# Altium PCB EVB-A32M1-F_PCB.PcbDoc
Units mm, origin at the board's own origin, x right, y up, seen from the top; angles counter-clockwise.
Board outline 51 x 21 mm, 4 copper layers (L1 (Signal), L2 (GND), L3 (PWR), L4 (Signal)), stack 1.586 mm thick; 29 components, 45 nets, 289 pads, 57 vias.
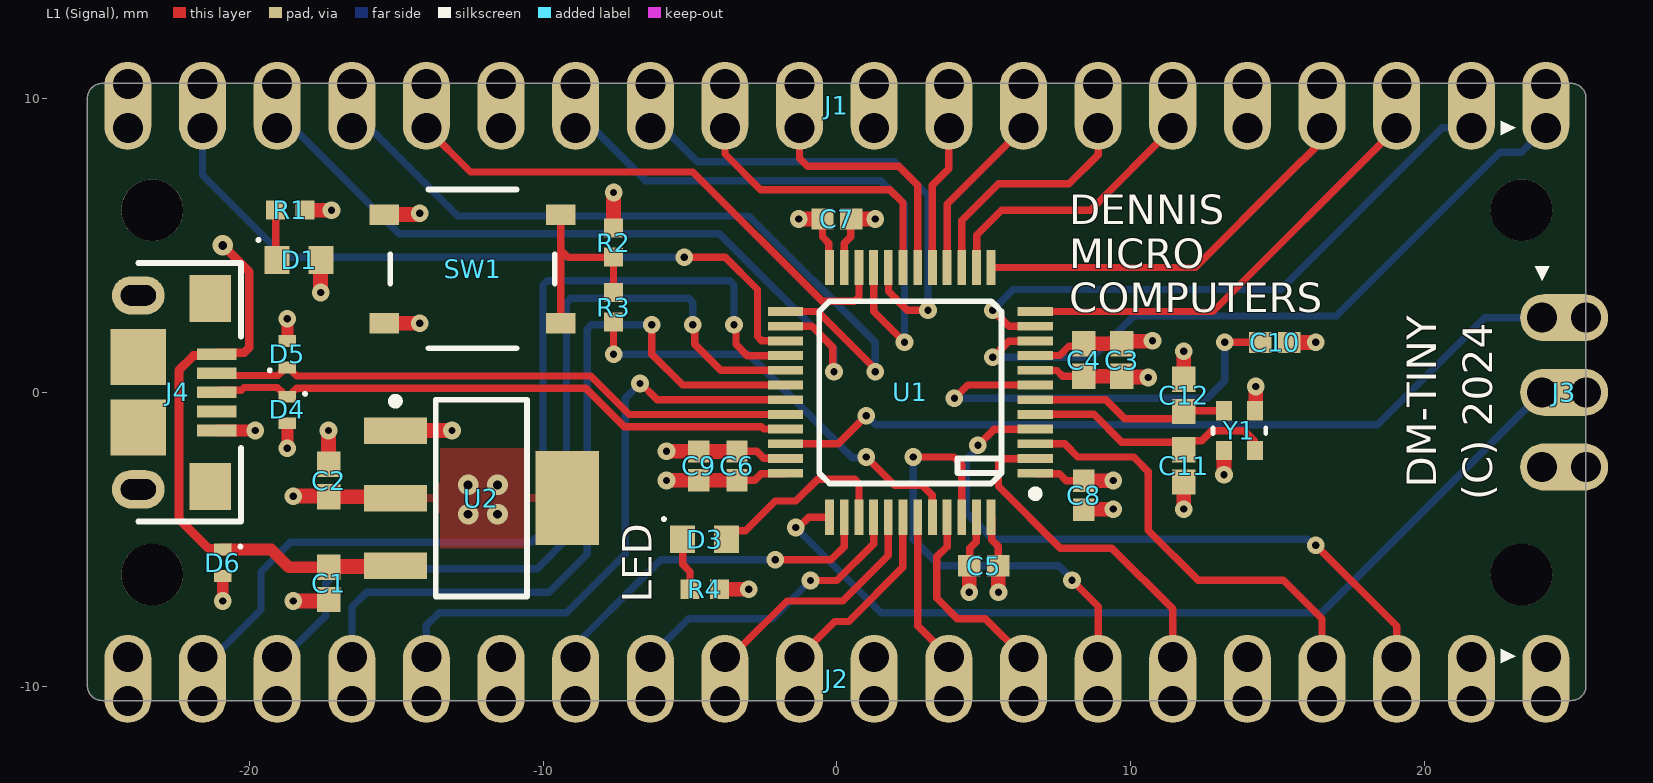
[diagram p0: L1 (Signal) view]
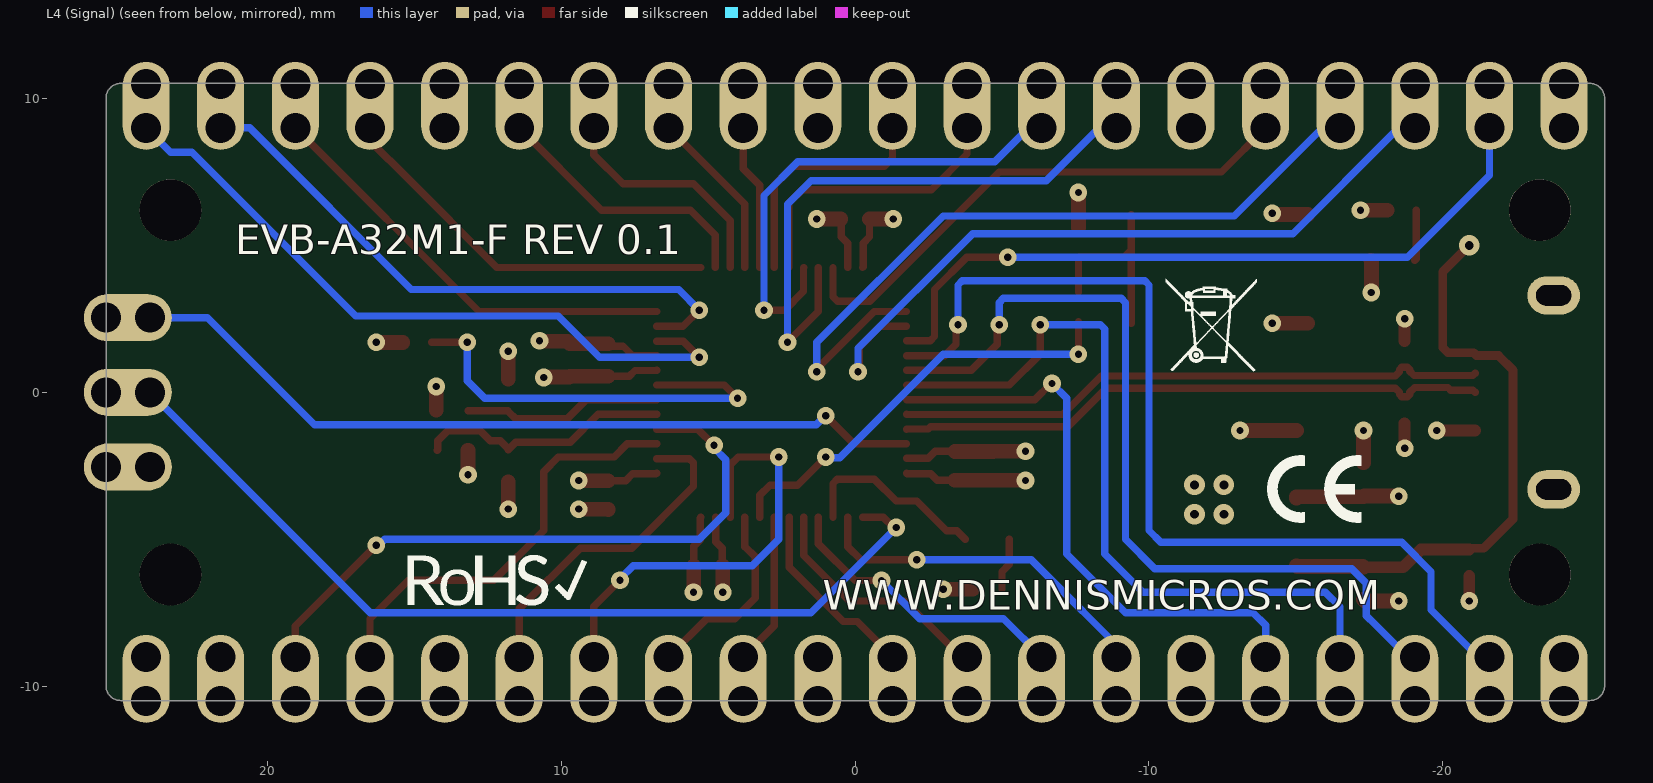
[diagram p1: L4 (Signal) view, seen from below]
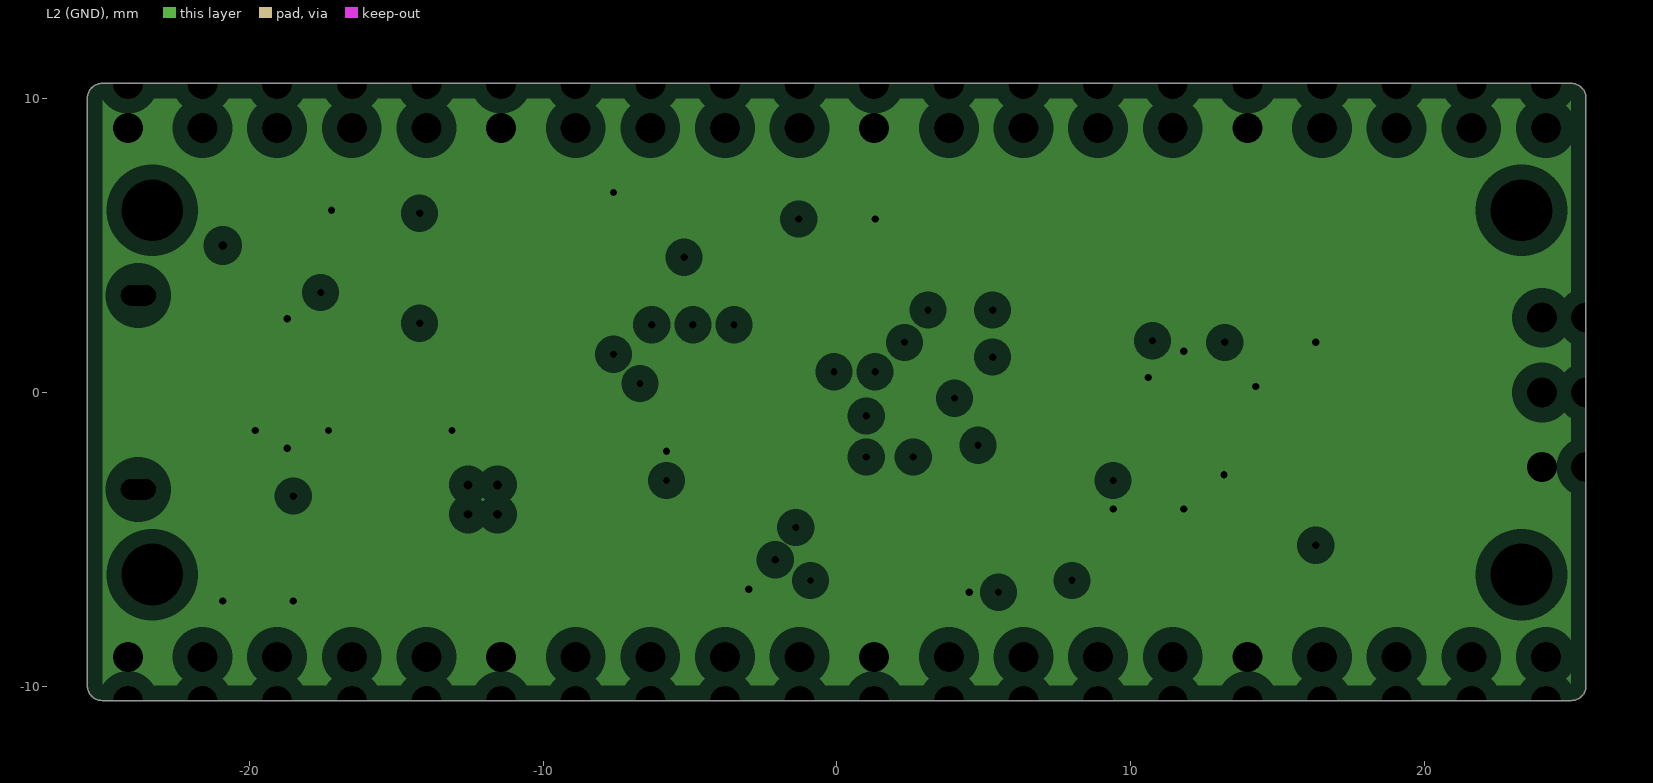
[diagram p2: L2 (GND), clearances drawn from the general rule]
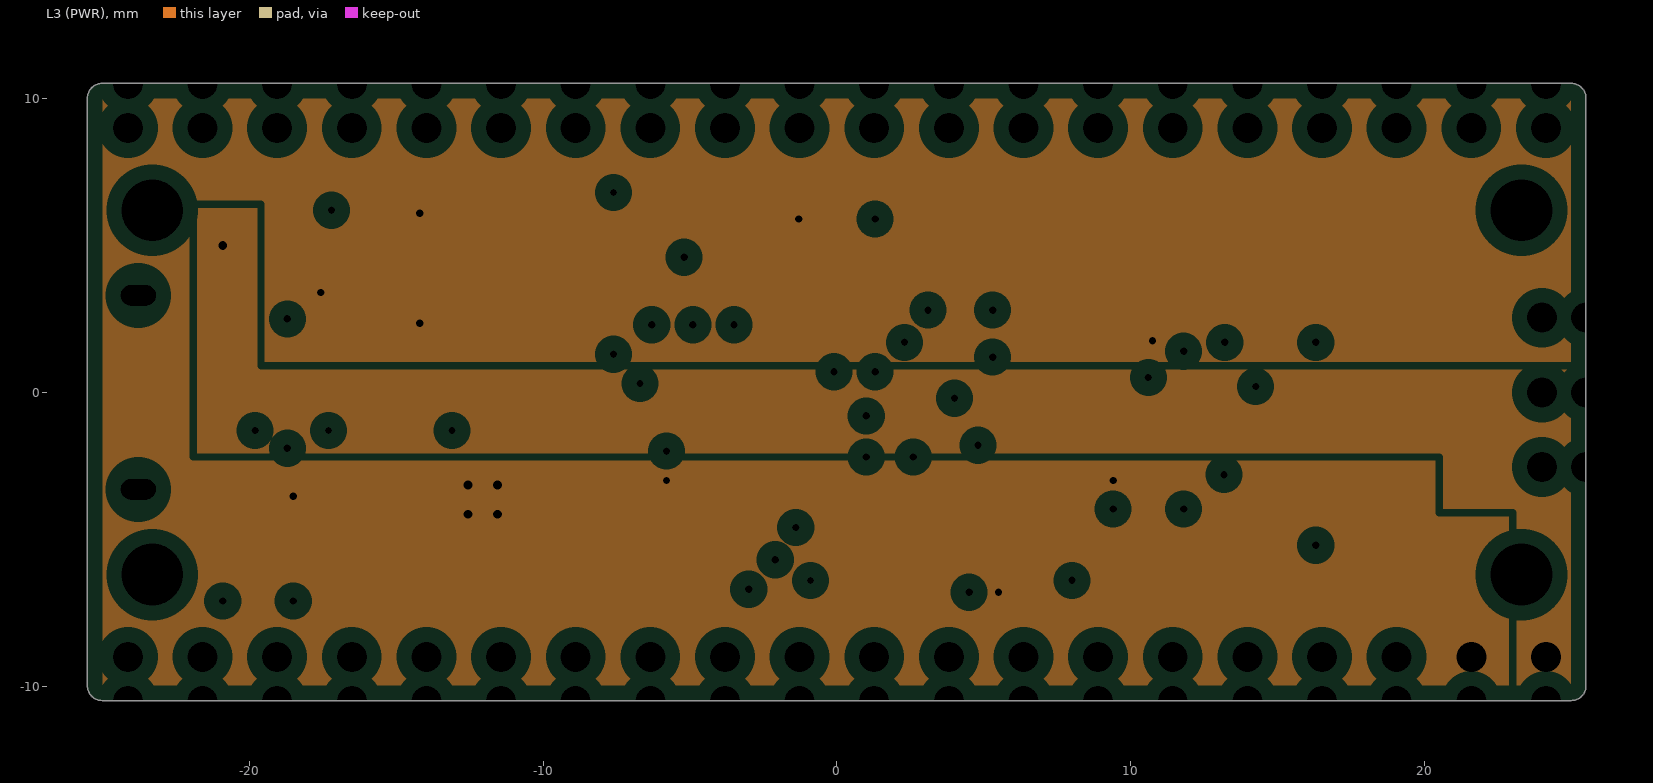
[diagram p3: L3 (PWR), clearances drawn from the general rule]
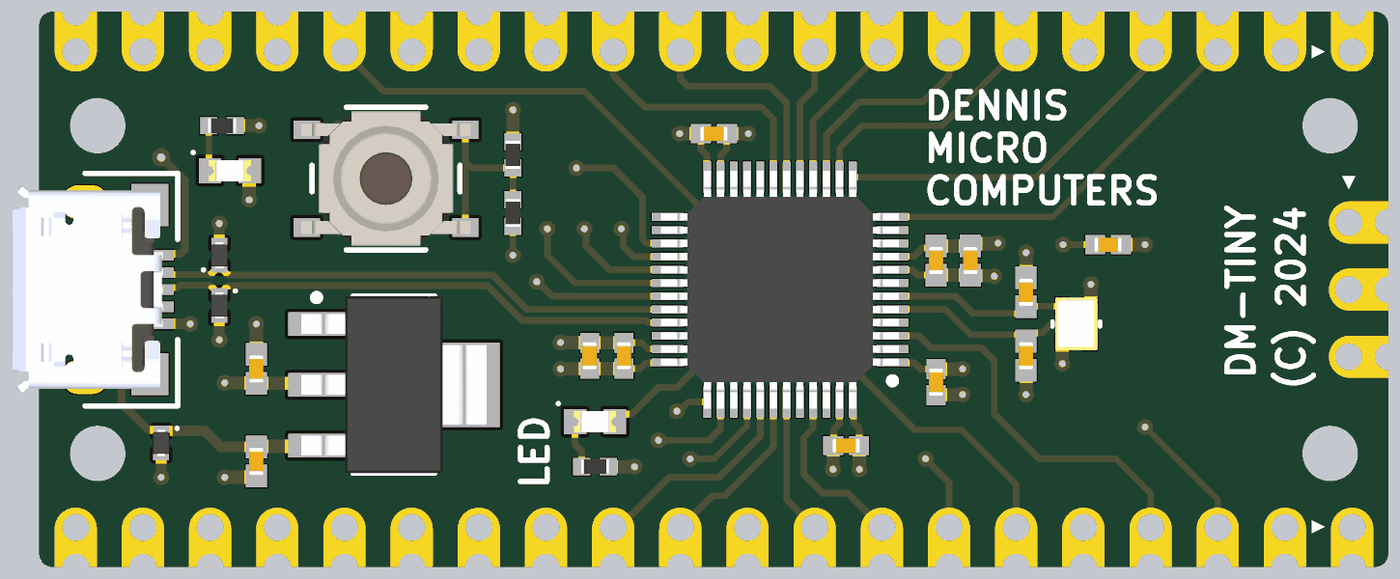
[diagram p4: 3D render of the assembled board from above, using the file's embedded part models]

## Layer stack, top to bottom
Top Solder: solder mask 0.0152, JLC-001, Dk 3.8
L1 (Signal): signal copper 0.035
PP1_7628: prepreg 0.2104, Nan Ya Plastics NP-155F 7628, Dk 4.4
L2 (GND): plane copper 0.0152, net GND
C_FR4: core 1.065, Nan Ya Plastics NP-155F FR4 / 5-7628, Dk 4.6
L3 (PWR): plane copper 0.0152, net +3V3
PP2_7628: prepreg 0.2104, Nan Ya Plastics NP-155F 7628, Dk 4.4
L4 (Signal): signal copper 0.035
Bottom Solder: solder mask 0.0152, JLC-001, Dk 3.8

## Board outline
-25.507,-9.987 -25.507,10.013 cw(c-25.007,10.013) -25.007,10.513 24.993,10.513 cw(c24.993,10.013) 25.493,10.013 25.493,-9.987 cw(c24.993,-9.987) 24.993,-10.487 -25.007,-10.487 cw(c-25.007,-9.987)

## Design rules (kind name [scope] priority, off if disabled: settings)
BoardOutlineClearance [IsText = 'True'] p1: gap=0.3 ignorepadtopadclearanceinfootprint=FALSE
Clearance ClearanceCastellated [InPadClass('Castellated')] p1: gap=0 ignorepadtopadclearanceinfootprint=FALSE
Clearance [All] p2: gap=0.25 ignorepadtopadclearanceinfootprint=FALSE except(0.1: Arc-Arc Arc-Track Track-Track; 0.15: SMDPad-SMDPad; 0.22: Arc-SMDPad Track-SMDPad; 0.27: Arc-Via Arc-Hole Track-Via Track-Hole; 0.5: THPad-THPad)
DiffPairsRouting [InDifferentialPairClass('DIFF_USB')] p1: maxlimit=0.16 minlimit=0.16 mostfreqgap=0.16 toplayer_minwidth=0.25 toplayer_maxwidth=0.25 toplayer_prefwidth=0.25 bottomlayer_minwidth=0.25 bottomlayer_maxwidth=0.25 bottomlayer_prefwidth=0.25 impedanceprofiledriven=TRUE impedanceprofileid={08012B50-AAB2-4C45-ABE7-EA8999D4259F} impedanceprofilevalue=90.000000 maxuncoupledlength=12.7
HoleSize NPTHSlotSize [HoleType = 'Slot' && PadIsPlated = 'False'] p1: absolutevalues=TRUE maxlimit=5.6 minlimit=1 maxpercent=80.000 minpercent=20.000
HoleSize PTHSlotSize [HoleType = 'Slot' && PadIsPlated = 'True'] p2: absolutevalues=TRUE maxlimit=5.6 minlimit=0.5 maxpercent=80.000 minpercent=20.000
HoleSize PTHSize [PadIsPlated = 'True'] p3: absolutevalues=TRUE maxlimit=6.35 minlimit=0.2 maxpercent=80.000 minpercent=20.000
HoleSize NPTHSize [PadIsPlated = 'False'] p4: absolutevalues=TRUE maxlimit=6.3 minlimit=0.2 maxpercent=80.000 minpercent=20.000
HoleToHoleClearance HoleToHoleClearanceCastellated [InPadClass('Castellated')] p1: gap=0.254 allowstackedmicrovias=TRUE
HoleToHoleClearance [All] p2: gap=0.5 allowstackedmicrovias=TRUE
MinimumAnnularRing ViaMinimumAnnularRing [IsVia] p1: minimumring=0.15
MinimumAnnularRing MinimumAnnularRingCastellated [InPadClass('Castellated')] p2: minimumring=0
MinimumAnnularRing PTHSlotMinimumAnnularRing [HoleType = 'Slot' && PadIsPlated = 'True'] p3: minimumring=0.3
MinimumAnnularRing PTHMinimumAnnularRing [HoleType = 'Round' && IsVia = 'False' && PadIsPlated = 'True'] p4: minimumring=0.3
MinimumSolderMaskSliver [All] p1: minsoldermaskwidth=0.1
PlaneClearance [All] p1: clearance=0.508
PlaneConnect [All] p1: pad.planeconnectstyle=Relief pad.reliefexpansion=0.508 pad.reliefentries=4 pad.reliefconductorwidth=0.254 pad.reliefairgap=0.254 via.planeconnectstyle=Direct via.reliefexpansion=0.508 via.reliefentries=4 via.reliefconductorwidth=0.254 via.reliefairgap=0.254
PolygonConnect [All] p1: thpad.connectstyle=Relief thpad.reliefconductorwidth=0.254 thpad.reliefentries=4 thpad.polygonreliefangle="90 Angle" thpad.airgapwidth=0.254 smdpad.connectstyle=Relief smdpad.reliefconductorwidth=0.254 smdpad.reliefentries=4 smdpad.polygonreliefangle="90 Angle" smdpad.airgapwidth=0.254 via.connectstyle=Direct via.reliefconductorwidth=0.254 via.reliefentries=4 via.polygonreliefangle="90 Angle" via.airgapwidth=0.254
RoutingVias [All] p1: holewidth=0.25 width=0.6 viastyle="Through Hole" minholewidth=0.2 minwidth=0.5 maxholewidth=0.3 maxwidth=0.7
ShortCircuit ShortCircuitCastellated [InPadClass('Castellated')] p1: allowed=TRUE
ShortCircuit [All] p2: allowed=FALSE
SilkToSilkClearance [All] p1: silktosilkclearance=0.3
SilkToSolderMaskClearance [IsPad] p1: minsilkscreentomaskgap=0.15 clearancetoexposedcopper=TRUE
SolderMaskExpansion [All] p1: expansion=0.127 istentingtop=FALSE
SupplyNets "Schematic Supply Nets_5" [InNet('VBUS')] p1: voltage=0.000
SupplyNets "Schematic Supply Nets_4" [InNet('GND')] p2: voltage=0.000
SupplyNets "Schematic Supply Nets" [InNet('+3V3')] p3: voltage=0.000
UnRoutedNet [All] p1: checkbadconnections=TRUE
Width [All] p1: maxlimit=0.5 minlimit=0.1 preferedwidth=0.25
20 further rules are at their usual default settings.

## Classes and differential pairs
pad class Castellated: J1-0 J1-1 J1-1B J1-1T J1-2 J1-2B J1-2T J1-3 J1-3B J1-3T J1-4 J1-4B J1-4T J1-5 J1-5B J1-5T J1-6 J1-6B J1-6T J1-7 J1-7B J1-7T J1-8 J1-8B J1-8T J1-9 J1-9B J1-9T J1-10 J1-10B J1-10T J1-11 J1-11B J1-11T J1-12 J1-12B J1-12T J1-13 J1-13B J1-13T J1-14 J1-14B J1-14T J1-15 J1-15B J1-15T J1-16 J1-16B J1-16T J1-17 J1-17B J1-17T J1-18 J1-18B J1-18T J1-19 J1-19B J1-19T J1-20 J1-20B J1-20T J2-0 J2-1 J2-1B J2-1T J2-2 J2-2B J2-2T J2-3 J2-3B J2-3T J2-4 J2-4B J2-4T J2-5 J2-5B J2-5T J2-6 J2-6B J2-6T J2-7 J2-7B J2-7T J2-8 J2-8B J2-8T J2-9 J2-9B J2-9T J2-10 J2-10B J2-10T J2-11 J2-11B J2-11T J2-12 J2-12B J2-12T J2-13 J2-13B J2-13T J2-14 J2-14B J2-14T J2-15 J2-15B J2-15T J2-16 J2-16B J2-16T J2-17 J2-17B J2-17T J2-18 J2-18B J2-18T J2-19 J2-19B J2-19T J2-20 J2-20B J2-20T J3-0 J3-1 J3-1B J3-1T J3-2 J3-2B J3-2T J3-3 J3-3B J3-3T
differential pair class DIFF_USB: USB_D
differential pair USB_D: +USB_D_P -USB_D_N

## Components (designator, comment, footprint, x,y, rotation, side; value= is the part's Value field where it differs from the comment)
C1 "CC0402MRX5R6BB105" C_Yageo_CC_0402_A -17.3,-6.5 r90 top value=1uF
C2 "CC0402MRX5R6BB105" C_Yageo_CC_0402_A -17.3,-3 r270 top value=1uF
C3 "CC0402MRX5R6BB105" C_Yageo_CC_0402_A 9.7,1.1 r90 top value=1uF
C4 "CC0402KRX7R7BB103" C_Yageo_CC_0402_A 8.4,1.1 r90 top value=10nF
C5 "CL05B104KP5NNNC" C_Samsung_CL_0402_A 5,-5.9 r0 top value=100nF
C6 "CL05B104KP5NNNC" C_Samsung_CL_0402_A -3.4,-2.5 r270 top value=100nF
C7 "CL05B104KP5NNNC" C_Samsung_CL_0402_A 0,5.9 r180 top value=100nF
C8 "CL05B104KP5NNNC" C_Samsung_CL_0402_A 8.4,-3.5 r90 top value=100nF
C9 "CL05A475MP5NRNC" C_Samsung_CL_0402_A -4.7,-2.5 r270 top value=4.7uF
C10 "CL05B104KP5NNNC" C_Samsung_CL_0402_A 14.9,1.7 r180 top value=100nF
C11 "CC0402JRNPO9BN150" C_Yageo_CC_0402_A 11.8,-2.5 r90 top value=15pF
C12 "CC0402JRNPO9BN150" C_Yageo_CC_0402_A 11.8,-0.1 r270 top value=15pF
D1 "LTST-C190GKT" D_LED_Lite-On_Green_0603_A -18.3,4.5 r0 top
D3 "LTST-C190GKT" D_LED_Lite-On_Green_0603_A -4.5,-5 r0 top
D4 "D5V0F1U2S9-7" D_TVS_Uni_Diodes_SOD-923_B -18.7,-0.6 r270 top value=5E-13F
D5 "D5V0F1U2S9-7" D_TVS_Uni_Diodes_SOD-923_B -18.7,1.3 r90 top value=5E-13F
D6 "D5V0F1U2S9-7" D_TVS_Uni_Diodes_SOD-923_B -20.9,-5.8 r270 top value=5E-13F
J1 "PPPC201LFBN-RC" J_Cast_TH20_Top_2.54mm 0,9.75 r180 top
J2 "PPPC201LFBN-RC" J_Cast_TH20_Bottom_2.54mm 0,-9.75 r180 top
J3 "PPPC031LFBN-RC" J_Cast_TH3_Bottom_2.54mm 24.75,0 r270 top
J4 "10118193-0001LF" J_USB_Micro-B_Amphenol_10118193-0001LF -23.775,0 r270 top
R1 "RC0402FR-071KL" R_Yageo_RCL_0402_A -18.6,6.2 r180 top value=1kR
R2 "RC0402FR-0710KL" R_Yageo_RCL_0402_A -7.6,5.1 r270 top value=10kR
R3 "RC0402FR-071KL" R_Yageo_RCL_0402_A -7.6,2.9 r90 top value=1kR
R4 "RC0402FR-071KL" R_Yageo_RCL_0402_A -4.5,-6.7 r180 top value=1kR
SW1 "PTS526SK15SMTR2LFS" "SW_Tactitle_SPST_C&K_PTS526 SK15 SMTR2 LFS" -12.4,4.2 r180 top
U1 "STM32F070CBT6" U_ST_LQFP48_B 2.5,0 r180 top
U2 "TLV1117LV33DCYR" U_TI_SOT-223_B -12.1,-3.6 r0 top
Y1 "ECS-240-12-37B-CKY-TR" Y_Crystal_GND24_ECS_240-12-37B-CKY-TR 13.7,-1.3 r90 top

## Footprints (in the part's own frame and the unit in brackets; to place one, negate y for a bottom-side part, rotate by r counter-clockwise, add the part's x,y. Pads: shape width x height; smd on the part's side, far side on the other; paste and mask are expansions set on the pad)
C_Samsung_CL_0402_A [mm] "Chip Capacitor, 2-Leads, Body 1.00x0.50mm, IPC Low Density"
  rect 0.76x0.72 smd mask+0.05: 1(-0.49,0) 2(0.49,0)
  body extent -0.53,-0.28 0.53,0.28, height 0.55
C_Yageo_CC_0402_A [mm] "Yageo series CC Chip Capacitor, 2-Leads, Body 1.00x0.50mm, IPC Low Density"
  rect 0.86x0.8 smd mask+0.05: 1(-0.55,0) 2(0.55,0)
  body extent -0.53,-0.28 0.53,0.28, height 0.7
D_LED_Lite-On_Green_0603_A [mm] "Chip Diode, 2-Leads, Body 1.60x0.70mm, IPC Low Density"
  rect 0.85x0.95 smd: 1(-0.75,0) 2(0.75,0)
  silkscreen extent -1.44,0.64 -1.34,0.74, body extent -0.8,-0.4 0.8,0.4, height 0.8
D_TVS_Uni_Diodes_SOD-923_B [mm] "SODFL, 2-Leads, Body 0.60x1.00mm, IPC Medium Density"
  rect 0.4x0.6 smd: 1(-0.45,0) 2(0.45,0)
  silkscreen extent -0.6,0.55 -0.5,0.65, body extent -0.5,-0.33 0.5,0.33, height 0.4
J_Cast_TH3_Bottom_2.54mm [mm] "20 castellated pads with 2.54mm pitch through-holes"
  round 1.02 hole 1.02 paste-2539.97 mask+0: 0(-2.54,0.75) 0(0,0.75) 0(2.54,0.75) 1(-2.54,-0.75) 2(0,-0.75) 3(2.54,-0.75)
  oval 1.6x3 smd far side paste-2539.97 mask+0: 1B(-2.54,0) 2B(0,0) 3B(2.54,0)
  oval 1.6x3 smd paste-2539.97 mask+0: 1T(-2.54,0) 2T(0,0) 3T(2.54,0)
J_Cast_TH20_Bottom_2.54mm [mm] "20 castellated pads with 2.54mm pitch through-holes"
  round 1.02 hole 1.02 paste-2539.97 mask+0: 0(-24.13,0.75) 0(-21.59,0.75) 0(-19.05,0.75) 0(-16.51,0.75) 0(-13.97,0.75) 0(-11.43,0.75) 0(-8.89,0.75) 0(-6.35,0.75) 0(-3.81,0.75) 0(-1.27,0.75) 0(1.27,0.75) 0(3.81,0.75) 0(6.35,0.75) 0(8.89,0.75) 0(11.43,0.75) 0(13.97,0.75) 0(16.51,0.75) 0(19.05,0.75) 0(21.59,0.75) 0(24.13,0.75) 1(-24.13,-0.75) 2(-21.59,-0.75) 3(-19.05,-0.75) 4(-16.51,-0.75) 5(-13.97,-0.75) 6(-11.43,-0.75) 7(-8.89,-0.75) 8(-6.35,-0.75) 9(-3.81,-0.75) 10(-1.27,-0.75) 11(1.27,-0.75) 12(3.81,-0.75) 13(6.35,-0.75) 14(8.89,-0.75) 15(11.43,-0.75) 16(13.97,-0.75) 17(16.51,-0.75) 18(19.05,-0.75) 19(21.59,-0.75) 20(24.13,-0.75)
  oval 1.6x3 smd far side paste-2539.97 mask+0: 1B(-24.13,0) 2B(-21.59,0) 3B(-19.05,0) 4B(-16.51,0) 5B(-13.97,0) 6B(-11.43,0) 7B(-8.89,0) 8B(-6.35,0) 9B(-3.81,0) 10B(-1.27,0) 11B(1.27,0) 12B(3.81,0) 13B(6.35,0) 14B(8.89,0) 15B(11.43,0) 16B(13.97,0) 17B(16.51,0) 18B(19.05,0) 19B(21.59,0) 20B(24.13,0)
  oval 1.6x3 smd paste-2539.97 mask+0: 1T(-24.13,0) 2T(-21.59,0) 3T(-19.05,0) 4T(-16.51,0) 5T(-13.97,0) 6T(-11.43,0) 7T(-8.89,0) 8T(-6.35,0) 9T(-3.81,0) 10T(-1.27,0) 11T(1.27,0) 12T(3.81,0) 13T(6.35,0) 14T(8.89,0) 15T(11.43,0) 16T(13.97,0) 17T(16.51,0) 18T(19.05,0) 19T(21.59,0) 20T(24.13,0)
J_Cast_TH20_Top_2.54mm [mm] "20 castellated pads with 2.54mm pitch through-holes"
  round 1.02 hole 1.02 paste-2539.97 mask+0: 0(-24.13,-0.75) 0(-21.59,-0.75) 0(-19.05,-0.75) 0(-16.51,-0.75) 0(-13.97,-0.75) 0(-11.43,-0.75) 0(-8.89,-0.75) 0(-6.35,-0.75) 0(-3.81,-0.75) 0(-1.27,-0.75) 0(1.27,-0.75) 0(3.81,-0.75) 0(6.35,-0.75) 0(8.89,-0.75) 0(11.43,-0.75) 0(13.97,-0.75) 0(16.51,-0.75) 0(19.05,-0.75) 0(21.59,-0.75) 0(24.13,-0.75) 1(-24.13,0.75) 2(-21.59,0.75) 3(-19.05,0.75) 4(-16.51,0.75) 5(-13.97,0.75) 6(-11.43,0.75) 7(-8.89,0.75) 8(-6.35,0.75) 9(-3.81,0.75) 10(-1.27,0.75) 11(1.27,0.75) 12(3.81,0.75) 13(6.35,0.75) 14(8.89,0.75) 15(11.43,0.75) 16(13.97,0.75) 17(16.51,0.75) 18(19.05,0.75) 19(21.59,0.75) 20(24.13,0.75)
  oval 1.6x3 smd far side paste-2539.97 mask+0: 1B(-24.13,0) 2B(-21.59,0) 3B(-19.05,0) 4B(-16.51,0) 5B(-13.97,0) 6B(-11.43,0) 7B(-8.89,0) 8B(-6.35,0) 9B(-3.81,0) 10B(-1.27,0) 11B(1.27,0) 12B(3.81,0) 13B(6.35,0) 14B(8.89,0) 15B(11.43,0) 16B(13.97,0) 17B(16.51,0) 18B(19.05,0) 19B(21.59,0) 20B(24.13,0)
  oval 1.6x3 smd paste-2539.97 mask+0: 1T(-24.13,0) 2T(-21.59,0) 3T(-19.05,0) 4T(-16.51,0) 5T(-13.97,0) 6T(-11.43,0) 7T(-8.89,0) 8T(-6.35,0) 9T(-3.81,0) 10T(-1.27,0) 11T(1.27,0) 12T(3.81,0) 13T(6.35,0) 14T(8.89,0) 15T(11.43,0) 16T(13.97,0) 17T(16.51,0) 18T(19.05,0) 19T(21.59,0) 20T(24.13,0)
J_USB_Micro-B_Amphenol_10118193-0001LF [mm] "USB - micro B USB 2.0 Receptacle Connector 5 Position Surface Mount, Right Angle; Through Hole"
  rect 0.4x1.35 smd mask+0.05: 1(-1.3,2.675) 2(-0.65,2.675) 3(0,2.675) 4(0.65,2.675) 5(1.3,2.675)
  rect 1.6x1.4 smd mask+0.05: 6(-3.2,2.45) 7(3.2,2.45)
  rect 1.9x1.9 smd mask+0.05: 8(1.2,0) 9(-1.2,0)
  oval 1.3x1.8 hole 0.7 slot 1.2 at 90 deg mask+0.05: 10(3.3,0) 11(-3.3,0)
  silkscreen extent -4.4,0 4.4,3.5, body extent -3.93,-2.76 3.93,2.95, height 2.81
R_Yageo_RCL_0402_A [mm] "Yageo series RC_L Chip Resistor, 2-Leads, Body 1.00x0.50mm, IPC Low Density"
  rect 0.65x0.65 smd mask+0.05: 1(-0.5,0) 2(0.5,0)
  body extent -0.53,-0.28 0.53,0.28, height 0.4
"SW_Tactitle_SPST_C&K_PTS526 SK15 SMTR2 LFS" [mm]
  rect 1x0.7 smd: 1(-3,1.85) 2(-3,-1.85) 3(3,1.85) 4(3,-1.85)
  silkscreen extent -2.8,-2.7 2.8,2.7, body extent -3.2,-2.55 3.2,2.55, height 1.5
U_ST_LQFP48_B [mm] "LQFP, 48-Leads, Body 9.00x9.00mm, Pitch 0.50mm, IPC Medium Density"
  rect 1.2x0.3 smd mask+0.05: 1(-4.25,2.75) 2(-4.25,2.25) 3(-4.25,1.75) 4(-4.25,1.25) 5(-4.25,0.75) 6(-4.25,0.25) 7(-4.25,-0.25) 8(-4.25,-0.75) 9(-4.25,-1.25) 10(-4.25,-1.75) 11(-4.25,-2.25) 12(-4.25,-2.75) 25(4.25,-2.75) 26(4.25,-2.25) 27(4.25,-1.75) 28(4.25,-1.25) 29(4.25,-0.75) 30(4.25,-0.25) 31(4.25,0.25) 32(4.25,0.75) 33(4.25,1.25) 34(4.25,1.75) 35(4.25,2.25) 36(4.25,2.75)
  rect 0.3x1.2 smd mask+0.05: 13(-2.75,-4.25) 14(-2.25,-4.25) 15(-1.75,-4.25) 16(-1.25,-4.25) 17(-0.75,-4.25) 18(-0.25,-4.25) 19(0.25,-4.25) 20(0.75,-4.25) 21(1.25,-4.25) 22(1.75,-4.25) 23(2.25,-4.25) 24(2.75,-4.25) 37(2.75,4.25) 38(2.25,4.25) 39(1.75,4.25) 40(1.25,4.25) 41(0.75,4.25) 42(0.25,4.25) 43(-0.25,4.25) 44(-0.75,4.25) 45(-1.25,4.25) 46(-1.75,4.25) 47(-2.25,4.25) 48(-2.75,4.25)
  silkscreen extent -4.38,-3.1 3.1,3.57, body extent -4.5,-4.5 4.5,4.5, height 1.55
U_TI_SOT-223_B [mm] "SOT223, 4-Leads, Body 6.50x7.00mm (avg), Pitch 2.30mm, IPC Medium Density"
  rect 2.15x0.9 smd: 1(-2.925,2.3) 2(-2.925,0) 3(-2.925,-2.3)
  rect 2.15x3.2 smd: 4(2.925,0)
  silkscreen extent -3.05,-3.35 1.55,3.42, body extent -3.5,-3.35 3.5,3.35, height 1.8
Y_Crystal_GND24_ECS_240-12-37B-CKY-TR [mm]
  rect 0.65x0.55 smd mask+0.05: 1(-0.675,-0.525) 2(0.675,-0.525) 3(0.675,0.525) 4(-0.675,0.525)
  silkscreen extent -0.1,-0.9 0.1,0.9, body extent -1,-0.8 1,0.8, height 0.51

## Part data
C1 C2 C3: library part CMP-001-00016-11, "Multilayer Ceramic Capacitor, 1 uF, 50 V, ± 10%, X5R, 0402 [1005 Metric]", Case Code (Imperial)=0402, Case Code (Metric)=1005, Dielectric=X5R, LCSC Part Number=C113791, Max Operating Temperature=85°C, Min Operating Temperature=-55°C, Temperature Coefficient=30ppm/°C, Tolerance=20%, Voltage Rating=10V, Case/Package=0402, ComponentLink1Description=Datasheet, ComponentLink1URL=https://www.yageo.com/upload/media/product/app/datasheet/mlcc/upy-gphc_x5r_4v-to-50v.pdf, Dissipation Factor=10%, Halogen Free="Halogen Free", Height=0.5mm, Lead Free="Lead Free", Length=0.039inch, Material=Ceramic, Mounting Technology="Surface Mount", Packaging="Tape and Reel", Pins=2, RoHS Compliant=Yes, Series=CC, Termination=SMD/SMT, Thickness=0.022inch, Voltage Rating (DC)=10V, Width=0.02inch
C4: library part CMP-001-00029-1, "Multilayer Ceramic Capacitor, 0.01 uF, 16 V, ± 10%, X7R, 0402 [1005 Metric]", Case Code (Imperial)=0402, Case Code (Metric)=1005, Dielectric=X7R, Insulation Resistance=10GR, Max Operating Temperature=125°C, Min Operating Temperature=-55°C, Package Quantity=1, Temperature Coefficient=30ppm/°C, Tolerance=10%, Voltage Rating=16V, Case/Package=0402, ComponentLink1Description=Datasheet, ComponentLink1URL=https://www.yageo.com/upload/media/product/productsearch/datasheet/mlcc/UPY-GPHC_X7R_6.3V-to-250V_24.pdf, Depth=0.5mm, Dissipation Factor=3.5%, Halogen Free="Halogen Free", Height=0.5mm, Lead Free="Lead Free", Length=1mm, Material=Ceramic, Mounting Technology="Surface Mount", Packaging="Tape and Reel", Pins=2, Radiation Hardening=No, Reach SVHC Compliant=No, RoHS Compliant=Yes, Series=CC, Termination=SMD/SMT, Thickness=0.022inch, Voltage Rating (AC)=16V, Voltage Rating (DC)=16V, Width=0.02inch
C5 C6 C7 C8 C10: library part CMP-001-00023-3, "Multilayer Ceramic Capacitor, 0.1 uF, 10 V, ± 10%, X7R, 0402 [1005 Metric]", Case Code (Imperial)=0402, Case Code (Metric)=1005, Dielectric=X7R, Max Operating Temperature=125°C, Min Operating Temperature=-55°C, Package Quantity=1, Tolerance=10%, Voltage Rating=10V, Case/Package=0402, Construction=Flat, Depth=0.5mm, Height=0.5mm, Length=1mm, Material=Ceramic, Mounting Technology="Surface Mount", Packaging="Tape and Reel", Radiation Hardening=No, RoHS Compliant=Yes, Series=CL, Thickness=0.022inch, Voltage Rating (DC)=10V, Width=0.02inch
C9: library part CMP-001-00024-3, "Multilayer Ceramic Capacitor, 4.7 uF, 10 V, ± 20%, X5R, 0402 [1005 Metric]", Case Code (Imperial)=0402, Case Code (Metric)=1005, Dielectric=X5R, Max Operating Temperature=85°C, Min Operating Temperature=-55°C, Tolerance=20%, Voltage Rating=10V, Case/Package=0402, ComponentLink1Description=Datasheet, ComponentLink1URL=https://mm.digikey.com/Volume0/opasdata/d220001/medias/docus/863/CL05A475MP5NRNC_Spec.pdf, Height=550um, Lead Free="Lead Free", Material=Ceramic, Mounting Technology="Surface Mount", Packaging="Cut Tape", RoHS Compliant=Yes, Series=CL
C11 C12: library part CMP-001-00017-14, "Multilayer Ceramic Capacitor, 15 pF, 10 V, ± 5%, X7R, 0402 [1005 Metric]", Case Code (Imperial)=0402, Case Code (Metric)=1005, Dielectric=C0G, Dielectric Material=Ceramic, Insulation Resistance=100GR, Max Operating Temperature=125°C, Min Operating Temperature=-55°C, Package Quantity=1, Temperature Coefficient=30ppm/°C, Tolerance=5%, Voltage=50V, Case/Package=0402, ComponentLink1Description=Datasheet, ComponentLink1URL=https://www.yageo.com/upload/media/product/productsearch/datasheet/mlcc/UPY-GP_NP0_16V-to-50V_18.pdf, Depth=0.5mm, Halogen Free="Halogen Free", Height=0.5mm, Lead Free="Lead Free", Length=1mm, Material=Ceramic, Mounting Technology="Surface Mount", Packaging="Tape and Reel", Pins=2, Radiation Hardening=No, Reach SVHC Compliant=No, RoHS Compliant=Yes, Series=CC, Termination=SMD/SMT, Thickness=0.022inch, Voltage Rating=50V, Voltage Rating (AC)=50V, Voltage Rating (DC)=50V, Width=0.02inch
D1 D3: library part CMP-007-00001-3, "LED Uni-Color Green 565nm 2-Pin Chip LED T/R", Case Code (Imperial)=0603, Case Code (Metric)=1608, Color=Green, Forward Current=30mA, Forward Voltage=2.1V, Lens Color=Colorless, Max Operating Temperature=85°C, Min Operating Temperature=-55°C, Package Quantity=1, Power Dissipation=100mW, Reverse Voltage=5V, Test Current=10mA, Voltage=2V, Case/Package=0603, ComponentLink1Description=Datasheet, ComponentLink1URL=https://mm.digikey.com/Volume0/opasdata/d220001/medias/docus/858/LTST-C190GKT.pdf, Depth=0.8mm, Dominant Wavelength=569nm, Height=0.9mm, Illumination Color=Green, Lead Free="Lead Free", Length=1.6mm, Lens Size=0.8mm, Lens Style=Flat,Diffused,Colorless,Rectangular,Clear, Lens Transparency=Clear, Luminous Intensity=6mcd, Mounting Technology="Surface Mount", Number of Elements=1, Number of LEDs=1, Packaging="Tape and Reel", Pins=2, Power Rating=100mW, Radiation Hardening=No, RoHS Compliant=Yes, Series=-, Viewing Angle=130°, Wavelength=565nm, Width=0.8mm
D4 D5 D6: library part CMP-004-00007-2, "Diode TVS Dual Uni-Dir 5.5V 250000W 2-Pin SOD-923 T/R", Breakdown Voltage=6V, Case/Package=SOD-923-2, Clamping Voltage=10V, Max Operating Temperature=150°C, Max Power Dissipation=250mW, Max Reverse Leakage Current=100nA, Max Surge Current=1.5A, Min Operating Temperature=-65°C, Package Quantity=10000, Peak Pulse Power=250kW, Power Line Protection=Yes, Reverse Standoff Voltage=5.5V, ComponentLink1Description=Datasheet, ComponentLink1URL=https://www.diodes.com/assets/Datasheets/D5V0F1U2S9.pdf, Contact Plating=Tin,Matte, Diode Type=ZENER, Direction=Unidirectional, ESD Protection=Yes, Min Breakdown Voltage=6V, Mounting Technology="Surface Mount", Number of Unidirectional Channels=1, Packaging="Tape and Reel", Peak Pulse Current=1.5A, Polarity=Unidirectional, RoHS Compliant=Yes, Series=-, Termination=SMD/SMT, Working Voltage=5.5V
J1 J2: library part CMP-002-00009-9, "20 Position Total Single Row 2.54 mm Pitch Straight Female Header", Flammability Rating="UL94 V-0", Insulation Color=Black, Max Operating Temperature=105°C, Min Operating Temperature=-40°C, Voltage Rating=250V, ComponentLink1Description=Datasheet, ComponentLink1URL=https://mm.digikey.com/Volume0/opasdata/d220001/medias/docus/937/Female_Headers.100_DS.pdf, Connector Type=Header, Contact Finish - Mating=GOLD, Contact Material=Bronze, Contact Shape=Square, Contact Type="Female Socket", Fastening Type=Pull, Height=8.5mm, Housing Material=Plastic, Insulation Material=Polyester, Lead Free="Lead Free", Length=51.3mm, Mounting Technology="Through Hole", Number of Positions=20, Number of Rows=1, Packaging=Tray, Pitch=2.54mm, RoHS Compliant=Yes, Series=-, Termination=Solder, Width=2.5mm
J3: library part CMP-002-00004-17, "3 Position Total Single Row 2.54 mm Pitch Straight Female Header", Flammability Rating="UL94 V-0", Insulation Color=Black, Max Operating Temperature=105°C, Min Operating Temperature=-40°C, Voltage Rating=250V, ComponentLink1Description=Datasheet, ComponentLink1URL=https://mm.digikey.com/Volume0/opasdata/d220001/medias/docus/937/Female_Headers.100_DS.pdf, Connector Type=Header, Contact Finish - Mating=GOLD, Contact Material=Bronze, Contact Shape=Square, Contact Type="Female Socket", Fastening Type=Pull, Height=8.5mm, Housing Material=Plastic, Insulation Material=Polyester, Lead Free="Lead Free", Length=8.12mm, Mounting Technology="Through Hole", Number of Positions=3, Number of Rows=1, Packaging=Tray, Pitch=2.54mm, RoHS Compliant=Yes, Series=-, Termination=Solder, Width=2.5mm
J4: library part CMP-002-00002-12, "Usb Connector, 5 Contact(S), Female, Right Angle, Surface Mount Terminal, Locking, Receptacle", Color=Black, Current Rating=1.8A, Flammability Rating="UL94 V-0", Insulation Resistance=1GR, Max Operating Temperature=85°C, Max Voltage Rating (AC)=100V, Min Operating Temperature=-55°C, Package Quantity=1200, ComponentLink1Description=Drawing, ComponentLink1URL=https://cdn.amphenol-cs.com/media/wysiwyg/files/drawing/10118193.pdf, ComponentLink2Description=Datasheet, ComponentLink2URL=https://cdn.amphenol-cs.com/media/wysiwyg/files/documentation/datasheet/inputoutput/io_usb_micro.pdf, Connector Type=USB,Receptacle, Contact Material=Nickel,Gold, Contact Plating=Gold, Depth=5.67mm, Features=Shielded, Gender=Female, Height=3mm, Housing Material=Polymer, Length=7.86mm, Mounting Technology="Surface Mount,Horizontal", Number of Contacts=5, Number of Ports=1, Orientation="Right Angle", Packaging="Tape and Reel", Pins=11, Pitch=650um, Radiation Hardening=No, Series=-, Termination=Solder, USB Standard="USB 2.0", Voltage Rating=100V
R1 R3 R4: library part CMP-009-00002-11, "SMD Chip Resistor, 1 kOhm, ± 1%, 62.5 mW, 0402 [1005 Metric], Thick Film, General Purpose", Case Code (Imperial)=0402, Case Code (Metric)=1005, Max Operating Temperature=155°C, Max Power Dissipation=63mW, Min Operating Temperature=-55°C, Power Rating=62.5mW, Resistance Tolerance=1%, Resistor Type="Thick Film", Temperature Coefficient=100ppm/°C, Voltage Rating=50V, Case/Package=0402, ComponentLink1Description=Datasheet, ComponentLink1URL=https://www.yageo.com/upload/media/product/products/datasheet/rchip/PYu-RC_Group_51_RoHS_L_12.pdf, Construction=Rectangular, Depth=0.5mm, Features="Moisture Resistant", Height=0.32mm, Lead Free="Lead Free", Length=1mm, Military Standard=Not, Number of Terminations=2, Packaging="Tape and Reel", Pins=2, Reach SVHC Compliant=No, RoHS Compliant=Yes, Series=RC, Technology="THICK FILM", Termination=SMD/SMT, Tolerance=1%, Voltage Rating (AC)=50V, Voltage Rating (DC)=50V, Width=0.5mm
R2: library part CMP-009-00003-11, "SMD Chip Resistor, 10 kOhm, ± 1%, 62.5 mW, 0402 [1005 Metric], Thick Film, General Purpose", Case Code (Imperial)=0402, Case Code (Metric)=1005, Max Operating Temperature=155°C, Max Power Dissipation=63mW, Min Operating Temperature=-55°C, Power Rating=62.5mW, Resistance Tolerance=1%, Resistor Type="Thick Film", Temperature Coefficient=100ppm/°C, Voltage Rating=50V, Case/Package=0402, ComponentLink1Description=Datasheet, ComponentLink1URL=https://www.yageo.com/upload/media/product/products/datasheet/rchip/PYu-RC_Group_51_RoHS_L_12.pdf, Construction=Rectangular, Depth=0.5mm, Features="Moisture Resistant", Lead Free="Lead Free", Lead Pitch=0.2mm, Length=1mm, Military Standard=Not, Number of Terminations=2, Packaging="Tape and Reel", Pins=2, Reach SVHC Compliant=Unknown, RoHS Compliant=Yes, Series=RC, Termination=SMD/SMT, Tolerance=1%, Voltage Rating (DC)=50V, Width=0.5mm
SW1: library part CMP-011-00002-2, "Switch Tactile N.O. SPST Round Button Gull Wing 0.05A 12VDC 200000Cycles 2.45N SMD T/R", Contact Current Rating=50mA, Contact Resistance=100mR, Max Operating Temperature=70°C, Min Operating Temperature=-20°C, Operating Force=260gf, Ratings=IP40, Voltage Rating (DC)=12V, Actuator Type=Standard, ComponentLink1Description=Datasheet, ComponentLink1URL=https://www.ckswitches.com/media/2780/pts526.pdf, Height=1.65mm, Illumination Type=Non-Illuminated, Mechanical Life=200000Cycles, Mounting Technology="Surface Mount", Number of Positions=2, Series=PTS526, Switch Function=Off-Mom, Switch Travel=0.25mm, Termination="Gull Wing", Throw Configuration=SPST
U1: library part CMP-020-00002-1, "IC MCU 32BIT 128KB FLASH 48LQFP", Case/Package=LQFP, Clock Frequency=48MHz, Max Operating Temperature=85°C, Max Power Dissipation=364mW, Max Supply Voltage=3.6V, Min Operating Temperature=-40°C, Min Supply Voltage=2.4V, Operating Supply Voltage=3.3V, Package Quantity=250, Core Architecture=ARM, Data Bus Width=32b, Interface=I2C,SPI,USB,UART,USART, Lead Free="Lead Free", Memory Format=FLASH, Memory Size=128KB, Number of ADC Channels=1, Number of I/Os=37, Number of Programmable I/O=37, Number of Timers/Counters=8, Oscillator Type=Internal, Packaging=Tray, Peripherals=POR,PWM,WDT,DMA, Pins=48, RAM Size=16KB, RoHS Compliant=Yes, Series="STM32 F0", Watchdog Timer=Yes, Weight=0.006409oz
U2: library part CMP-019-00002-2, "LDO Regulator Pos 3.3V 1A 4-Pin(3+Tab) SOT-223 T/R", Case/Package=SOT-223-4, Dropout Voltage=570mV, Max Operating Temperature=125°C, Max Output current=1A, Max Output Voltage=3.3V, Max Supply Voltage=5.5V, Min Input Voltage=2V, Min Operating Temperature=-40°C, Operating Supply Current=50uA, Package Quantity=2500, Power Supply Rejection Ratio (PSRR)=75dB, Accuracy=2%, ComponentLink1Description=Datasheet, ComponentLink1URL=https://www.ti.com/lit/ds/symlink/tlv1117lv.pdf?HQS=dis-dk-null-digikeymode-dsf-pf-null-wwe&ts=1720283554424&ref_url=https%253A%252F%252Fwww.ti.com%252Fgeneral%252Fdocs%252Fsuppproductinfo.tsp%253FdistId%253D10%2526gotoUrl%253Dhttps%253A%252F%252Fwww.ti.com%252Flit%252Fgpn%252Ftlv1117lv, Lead Free="Lead Free", Min Output Voltage=3.3V, Number of Regulators=1, Output Configuration=Positive, Output Current=1A, Output Type=Fixed, Packaging="Cut Tape", Pins=4, Polarity=Positive, Quiescent Current=50uA, RoHS Compliant=Yes, Series=-, Weight=0.009171oz
Y1: library part CMP-003-00000-11, "Crystal 24MHz ±10ppm (Tol) ±10ppm (Stability) 12pF FUND 50Ohm 4-Pin Mini-CSMD T/R", Case/Package="4-SMD, No Lead", Frequency=24MHz, Load Capacitance=12pF, ComponentLink1Description=Datasheet, ComponentLink1URL=https://ecsxtal.com/store/pdf/ECX-1637B.pdf, Size="0.079\" L x 0.063\" W (2.00mm x 1.60mm)"

## Free pads (board coordinates)
  round 2.1 hole 2.1 unplated mask+0: MH1(-23.3,6.2) MH2(-23.3,-6.2) MH3(23.3,-6.2) MH4(23.3,6.2)

## Via types
v1: diameter 0.6, hole 0.25, L1 (Signal) to L4 (Signal), tented both sides, 52 vias
v2: diameter 0.7, hole 0.3, L1 (Signal) to L4 (Signal), tented both sides, 5 vias

## Nets (pads, with @x,y where several pads share a name; then routed paths per layer and width w, separated by ;. In a path a pad name is that pad's centre, name@x,y a point inside that pad or via, vN(x,y) a via of type N, cw(c..) or ccw(c..) an arc to the next point about the centre after c; other vN are vias at no path point)
3V3_LED_K: D1.1 R1.2 | length 1.7
  L1 (Signal) w0.25: R1.2 -19.1,4.55 D1.1
+3V3: C2.2 C3.2 C4.2 C5.2 C6.2 C7.2 C8.2 C9.2 D1.2 J2.2 J2.2B J2.2T SW1.3 SW1.4 U1.1 U1.9 U1.24 U1.36 U1.48 U2.2 U2.4 | length 23.4
  L1 (Signal) w0.25: C6.2 -2.79,-2.99 -2.575,-2.775 -1.775,-2.775 U1.36 ; C7.2 -0.49,5.29 -0.275,5.075 -0.275,4.275 U1.24 ; U1.48 5.275,-4.275 5.275,-5.025 5.49,-5.24 C5.2 ; U1.1 6.775,-2.775 7.575,-2.775 7.81,-3.01 C8.2 ; U1.9 6.755,1.255 7.58,1.255 7.9,1.575 8.325,1.575 C4.2
  L1 (Signal) w0.5: v1@-18.5,-3.5 -18.475,-3.525 -17.325,-3.525 C2.2 -15.025,-3.55 U2.2 ; v1@-17.6,3.4 -17.575,3.425 -17.575,4.475 D1.2 ; SW1.3 v1(-14.2,2.35) ; SW1.4 -14.272,6.05 -14.227,6.095 v1(-14.2,6.095) ; v1(-5.8,-3) -5.795,-2.995 -4.705,-2.995 C9.2 C6.2 ; v1(-1.3,5.9) C7.2 ; C5.2 5.495,-5.905 5.495,-6.795 v1(5.5,-6.8) ; C8.2 8.405,-3.005 9.395,-3.005 v1(9.4,-3) ; C4.2 C3.2 9.787,1.737 10.72,1.737 v1(10.739,1.756)
  other v1: -18.5,-3.53 -17.57,3.4
  other v2: -12.55,-4.15 -11.55,-4.15 -12.55,-3.15 -11.55,-3.15
BOOT0: R3.1 U1.44 | length 14.7
  L1 (Signal) w0.25: v1(-7.6,1.3) R3.1 ; v1(1,-2.2) 1.958,-3.158 2.896,-3.158 3.245,-3.507 3.245,-3.775 U1.44@3.245,-4.245
  L4 (Signal) w0.25: v1(-7.6,1.3) -3,1.3 0.523,-2.223 0.977,-2.223 v1(1,-2.2)
GND: C1.1 C2.1 C3.1 C4.1 C5.1 C6.1 C7.1 C8.1 C9.1 C10.1 C11.1 C12.1 D4.2 D5.2 D6.2 J1.5 J1.5B J1.5T J1.10 J1.10B J1.10T J1.15 J1.15B J1.15T J1.20 J1.20B J1.20T J2.5 J2.5B J2.5T J2.10 J2.10B J2.10T J2.15 J2.15B J2.15T J2.20 J2.20B J2.20T J3.3 J3.3B J3.3T J4.5 R1.1 R2.1 R4.1 U1.8 U1.23 U1.35 U1.47 U2.1 Y1.2 Y1.4 | length 29.9
  L1 (Signal) w0.25: C6.1 -2.728,-2.01 -2.493,-2.245 -1.755,-2.245 U1.35 ; U1.23 0.255,4.255 0.255,5.08 0.475,5.3 0.475,5.885 C7.1 ; C5.1 4.525,-5.885 4.525,-5.3 4.745,-5.08 4.745,-4.255 U1.47 ; U1.8 6.755,0.745 7.493,0.745 7.688,0.55 C4.1
  L1 (Signal) w0.4: J4.5 v1(-19.8,-1.3) ; v1(-20.9,-7.1) D6.2 ; v1(-18.7,-1.9) D4.2 ; D5.2 v1(-18.7,2.5)
  L1 (Signal) w0.5: v1(-18.5,-7.1) -17.35,-7.1 C1.1 ; R1.1 v1(-17.2,6.2) ; C2.1@-17.3,-2.4 v1(-17.3,-1.3) ; U2.1 v1(-13.1,-1.3) ; R2.1 v1(-7.6,6.8) ; v1(-5.8,-2) -5.795,-2.005 -4.705,-2.005 C9.1 C6.1 ; R4.1 v1(-3,-6.7) ; C7.1 v1(1.3,5.9) ; v1(4.5,-6.8) 4.505,-6.795 4.505,-5.905 C5.1 ; C8.1 8.409,-3.981 9.391,-3.981 v1(9.4,-3.972) ; C4.1 C3.1 9.726,0.524 10.581,0.524 v1(10.6,0.505) ; v1(11.8,-3.972) C11.1 ; C12.1 v1(11.8,1.4) ; Y1.4 v1(13.175,-2.8) v1@13.2,-2.8 ; Y1.2@14.25,-0.6 v1(14.25,0.2) ; C10.1 v1(16.3,1.7)
NRST: C10.2 U1.7 | length 14.9
  L1 (Signal) w0.25: v1(4,-0.2) 4.45,0.25 U1.7 ; v1(13.2,1.7) C10.2
  L4 (Signal) w0.25: v1(4,-0.2) 12.6,-0.2 13.2,0.4 v1(13.2,1.7)
OSC_IN: C11.2 U1.5 Y1.1 | length 8.7
  L1 (Signal) w0.25: U1.5 8.75,-0.75 9.7,-1.7 11.55,-1.7 C11.2 11.8,-1.92 12.075,-1.645 12.417,-1.645 12.757,-1.305 13.859,-1.305 14.2,-1.646 14.2,-1.95 Y1.1
OSC_OUT: C12.2 U1.6 Y1.3 | length 6.8
  L1 (Signal) w0.25: U1.6 9.15,-0.25 9.8,-0.9 11.55,-0.9 C12.2 11.825,-0.625 Y1.3
PA0: J1.1 J1.1B J1.1T U1.10 | length 23.7
  L1 (Signal) w0.25: v1(5.3,1.2) 5.845,1.745 6.745,1.745 U1.10
  L4 (Signal) w0.25: v1(5.3,1.2) 8.7,1.2 10.1,2.6 17,2.6 22.57,8.17 23.3,8.17 J1.1
PA1: J1.2 J1.2B J1.2T U1.11 | length 20.5
  L1 (Signal) w0.25: v1(5.3,2.8) 5.855,2.245 6.745,2.245 U1.11
  L4 (Signal) w0.25: v1(5.3,2.8) 6,3.5 15.1,3.5 20.6,9 J1.2
PA2: J1.3 J1.3B J1.3T U1.12 | length 14.9
  L1 (Signal) w0.25: U1.12 12.8,2.75 J1.3
PA3: J1.4 J1.4B J1.4T U1.13 | length 13.5
  L1 (Signal) w0.25: U1.13 12.199,4.25 15.349,7.4 16.363,8.414 16.363,8.853 J1.4
PA4: J1.6 J1.6B J1.6T U1.14 | length 9.3
  L1 (Signal) w0.25: U1.14 4.755,4.255 4.755,5.355 5.6,6.2 8.63,6.2 J1.6
PA5: J1.7 J1.7B J1.7T U1.15 | length 8.1
  L1 (Signal) w0.25: U1.15 4.25,5.85 5.5,7.1 7.9,7.1 8.89,8.09 J1.7
PA6: J1.8 J1.8B J1.8T U1.16 | length 5.8
  L1 (Signal) w0.25: U1.16 3.75,6.4 J1.8
PA7: J1.9 J1.9B J1.9T U1.17 | length 5
  L1 (Signal) w0.25: U1.17 3.25,7.05 3.81,7.61 J1.9
PA8: J2.18 J2.18B J2.18T U1.29 | length 29.5
  L1 (Signal) w0.25: v1(-4.9,2.3) -4.833,2.233 -4.833,1.633 -3.95,0.75 U1.29
  L4 (Signal) w0.25: J2.18 -18.842,-9 -18.591,-8.749 -18.549,-8.749 -17.7,-7.9 -17.4,-7.6 -17.4,-6.5 -16.9,-6 -10.2,-6 -9.2,-5 -9.2,3.054 -9.054,3.2 -5.046,3.2 -4.9,3.054 v1(-4.9,2.3)
PA9: J2.17 J2.17B J2.17T U1.30 | length 26.3
  L1 (Signal) w0.25: v1(-6.3,2.3) -6.3,1.3 -5.25,0.25 U1.30
  L4 (Signal) w0.25: J2.17 -16.5,-8.99 -16.5,-7.3 -16,-6.8 -9.8,-6.8 -8.5,-5.5 -8.5,2.154 -8.354,2.3 v1(-6.3,2.3)
PA10: J2.16 J2.16B J2.16T U1.31 | length 20
  L1 (Signal) w0.25: v1(-6.7,0.3) -6.669,0.3 -6.119,-0.25 U1.31
  L4 (Signal) w0.25: J2.16 -13.97,-7.93 -13.54,-7.5 -9.2,-7.5 -7.2,-5.5 -7.2,-0.2 v1(-6.7,0.3)
PA15: J2.14 J2.14B J2.14T U1.38 | length 11.9
  L1 (Signal) w0.25: v1(-2.1,-5.7) -0.2,-5.7 0.25,-5.25 U1.38
  L4 (Signal) w0.25: J2.14 -8.743,-8.853 -8.743,-8.443 -6.8,-6.5 -6,-5.7 v1(-2.1,-5.7)
PB0: J1.11 J1.11B J1.11T U1.18 | length 8.2
  L1 (Signal) w0.25: J1.11 -1.27,7.97 -1,7.7 2.1,7.7 2.75,7.05 U1.18
PB1: J1.12 J1.12B J1.12T U1.19 | length 9.8
  L1 (Signal) w0.25: J1.12 -3.81,8.11 -2.6,6.9 1.8,6.9 2.25,6.45 U1.19
PB2: J1.13 J1.13B J1.13T U1.20 | length 16.7
  L1 (Signal) w0.25: U1.20 1.755,4.245 1.755,3.445 2.4,2.8 v1(3.1,2.8)
  L4 (Signal) w0.25: J1.13 -6.203,8.853 -5.753,8.853 -4.75,7.85 1.95,7.85 3.1,6.7 v1(3.1,2.8)
PB4: J2.13 J2.13B J2.13T U1.40 | length 10.1
  L1 (Signal) w0.25: v1(-0.9,-6.405) -0.005,-6.405 1.25,-5.15 U1.40
  L4 (Signal) w0.25: J2.13 -5.05,-7.7 -2.195,-7.7 v1(-0.9,-6.405)
PB5: J2.12 J2.12B J2.12T U1.41 | length 8.3
  L1 (Signal) w0.25: J2.12 -3.602,-9 -3.331,-8.729 -3.329,-8.729 -1.7,-7.1 0.2,-7.1 1.75,-5.55 U1.41
PB6: J2.11 J2.11B J2.11T U1.42 | length 6.5
  L1 (Signal) w0.25: J2.11 -0.07,-7.8 0.4,-7.8 2.245,-5.955 2.245,-4.255 U1.42
PB7: J2.9 J2.9B J2.9T U1.43 | length 5.2
  L1 (Signal) w0.25: U1.43 2.75,-7.94 J2.9
PB8: J2.8 J2.8B J2.8T U1.45 | length 6.7
  L1 (Signal) w0.25: U1.45 3.75,-5.25 3.4,-5.6 3.4,-7 4.1,-7.7 5.05,-7.7 J2.8
PB9: J2.7 J2.7B J2.7T U1.46 | length 15.3
  L1 (Signal) w0.25: v1(2.6,-2.2) 3.982,-2.2 4.25,-2.468 U1.46 ; v1(8,-6.4) 8.89,-7.29 J2.7
  L4 (Signal) w0.25: v1(2.6,-2.2) 2.6,-5 3.5,-5.9 7.554,-5.9 8,-6.346 v1(8,-6.4)
PB10: J1.14 J1.14B J1.14T U1.21 | length 20
  L1 (Signal) w0.25: U1.21 1.25,2.75 v1(2.3,1.7)
  L4 (Signal) w0.25: J1.14 -8.809,8.919 -8.219,8.919 -6.5,7.2 1.5,7.2 2.3,6.4 v1(2.3,1.7)
PB11: J1.16 J1.16B J1.16T U1.22 | length 18.2
  L1 (Signal) w0.25: J1.16 -12.47,7.5 -4.9,7.5 -0.5,3.1 0.6,3.1 0.75,3.25 U1.22
PB12: J1.17 J1.17B J1.17T U1.25 | length 25.8
  L1 (Signal) w0.25: U1.25 -0.65,2.75 1.125,0.975 1.125,0.97 1.3,0.795 v1(1.3,0.7)
  L4 (Signal) w0.25: J1.17 -16.439,8.929 -15.829,8.929 -12.9,6 -3,6 1.3,1.7 v1(1.3,0.7)
PB13: J1.18 J1.18B J1.18T U1.26 | length 25.6
  L1 (Signal) w0.25: U1.26 -1.745,2.245 -0.845,2.245 -0.137,1.537 -0.137,0.737 v1(-0.1,0.7)
  L4 (Signal) w0.25: J1.18 -18.949,8.899 -18.399,8.899 -14.9,5.4 -4,5.4 -0.1,1.5 v1(-0.1,0.7)
PB14: J1.19 J1.19B J1.19T U1.27 | length 24.7
  L1 (Signal) w0.25: v1(-5.2,4.6) -3.8,4.6 -2.7,3.5 -2.7,1.9 -2.555,1.755 -1.755,1.755 U1.27
  L4 (Signal) w0.25: J1.19 -21.59,7.39 -18.8,4.6 v1(-5.2,4.6)
PB15: J2.19 J2.19B J2.19T U1.28 | length 33
  L1 (Signal) w0.25: v1(-3.5,2.3) -3.433,2.233 -3.433,1.633 -3.05,1.25 U1.28
  L4 (Signal) w0.25: J2.19 -21.443,-8.853 -21.053,-8.853 -19.6,-7.4 -19.6,-6.1 -18.6,-5.1 -10.4,-5.1 -10,-4.7 -10,3.654 -9.854,3.8 -3.646,3.8 -3.5,3.654 v1(-3.5,2.3)
PC13: J2.6 J2.6B J2.6T U1.2 | length 11.4
  L1 (Signal) w0.25: U1.2 6.745,-2.255 5.646,-2.255 5.5,-2.401 5.5,-3.2 7.6,-5.3 9.36,-5.3 11.43,-7.37 J2.6
PC14: J2.4 J2.4B J2.4T U1.3 | length 14.7
  L1 (Signal) w0.25: U1.3 7.75,-1.75 8.2,-2.2 10.1,-2.2 10.6,-2.7 10.6,-4.7 12.3,-6.4 15.2,-6.4 16.51,-7.71 J2.4
PC15: J2.3 J2.3B J2.3T U1.4 | length 21.9
  L1 (Signal) w0.25: v1(4.8,-1.8) 5.35,-1.25 U1.4 ; v1(16.3,-5.2) 19.05,-7.95 J2.3
  L4 (Signal) w0.25: v1(4.8,-1.8) 4.8,-1.895 4.4,-2.295 4.4,-4.1 5.3,-5 16.005,-5 16.205,-5.2 v1(16.3,-5.2)
PROG_LED: D3.2 U1.39 | length 6.6
  L1 (Signal) w0.25: D3.2 -3.46,-4.71 -3.11,-4.71 -2.1,-3.7 -1.4,-3.7 -0.655,-2.955 0.604,-2.955 0.75,-3.101 U1.39
PROG_LED_K: D3.1 R4.2 | length 1.8
  L1 (Signal) w0.25: D3.1 -5.25,-5.85 -5,-6.1 R4.2
SW_BOOT0: R2.2 R3.2 SW1.1 SW1.2 | length 6.8
  L1 (Signal) w0.25: SW1.1 -9.4,4.846 ; SW1.2 -9.4,4.846 ; R3.2 R2.2 -9.154,4.6 -9.4,4.846
SWCLK: J3.2 J3.2B J3.2T U1.37 | length 31
  L1 (Signal) w0.25: v1(-1.4,-4.6) -1.305,-4.6 -0.955,-4.25 U1.37
  L4 (Signal) w0.25: v1(-1.4,-4.6) 1.5,-7.5 16.5,-7.5 J3.2
SWDIO: J3.1 J3.1B J3.1T U1.34 | length 27.8
  L1 (Signal) w0.25: U1.34 0.05,-1.75 v1(1,-0.8)
  L4 (Signal) w0.25: v1(1,-0.8) 1.021,-0.8 1.321,-1.1 18.4,-1.1 22.04,2.54 J3.1
USB_D_N: D5.1 J4.2 U1.32 | length 20.2
  L1 (Signal) w0.25: J4.2 -21.025,0.575 -20.27,0.575 -19.021,0.575 -18.875,0.721 -18.875,0.775 -18.8,0.85 -18.6,0.85 -18.525,0.775 -18.525,0.701 -18.379,0.555 -8.375,0.555 -7.065,-0.755 -1.755,-0.755 U1.32
USB_D_P: D4.1 J4.3 U1.33 | length 20.3
  L1 (Signal) w0.25: J4.3 -21.025,0.075 -20.27,0.075 -20.18,0.165 -19.041,0.165 -18.875,-0.001 -18.875,-0.075 -18.8,-0.15 -18.6,-0.15 -18.525,-0.075 -18.525,-0.001 -18.379,0.145 -8.545,0.145 -7.235,-1.165 -2.573,-1.165 -2.493,-1.245 -1.755,-1.245 U1.33
VBUS: C1.2 D6.1 J2.1 J2.1B J2.1T J4.1 U2.3 | length 19.8
  L1 (Signal) w0.3: J4.1 J4.1@-21.05,1.35 ; D6.1 -20.943,-5.307 -21.393,-5.307 -22.395,-4.305 -22.395,0.753 -21.898,1.25 -21.15,1.25 J4.1@-21.05,1.35 ; v2(-20.9,5) -20,4.1 -20,1.526 -20.176,1.35 J4.1@-21.05,1.35
  L1 (Signal) w0.4: D6.1 -19.25,-5.35 -18.65,-5.95 C1.2
  L1 (Signal) w0.5: C1.2 -17.275,-5.925 -15.05,-5.925 U2.3
pads on no net: J1.0 J2.0 J3.0 J4.4 J4.6 J4.7 J4.8 J4.9 J4.10 J4.11

## Polygon pours and split planes (outlines as drawn)
+3V3 on L1 (Signal) "+3V3_L01_P000" (solid, pour order 0): -16.2,-3.1 -13.5,-3.1 -13.5,-1.9 -8,-1.9 -8,-5.3 -13.5,-5.3 -13.5,-4.1 -16.2,-4.1
GND on L2 (GND) (split plane): 24.983,-9.977 -24.997,-9.977 -24.997,10.003 24.983,10.003
+3V3 on L3 (PWR) (split plane): 24.983,1.027 -19.473,1.027 -19.473,6.4 -19.482,6.449 -19.51,6.49 -19.551,6.518 -19.6,6.527 -21.9,6.527 -21.949,6.518 -21.99,6.49 -22.018,6.449 -22.027,6.4 -22.027,2.9 -22.027,-2.2 -22.018,-2.249 -21.99,-2.29 -21.949,-2.318 -21.9,-2.327 20.373,-2.327 20.373,-4.1 20.382,-4.149 20.41,-4.19 20.451,-4.218 20.5,-4.227 22.873,-4.227 22.873,-9.977 -24.997,-9.977 -24.997,10.003 24.983,10.003
VBUS on L3 (PWR) (split plane): -19.727,0.9 -19.718,0.851 -19.69,0.81 -19.649,0.782 -19.6,0.773 24.983,0.773 24.983,-9.977 23.127,-9.977 23.127,-4.1 23.118,-4.051 23.09,-4.01 23.049,-3.982 23,-3.973 20.627,-3.973 20.627,-2.2 20.618,-2.151 20.59,-2.11 20.549,-2.082 20.5,-2.073 -21.773,-2.073 -21.773,2.9 -21.773,6.273 -19.727,6.273

## Other copper
L3 (PWR) (plane layer: these items are gaps in the copper):
  lines w0.1: 22.9,-10.6 25.6,-10.6 25.6,0.9
  lines w0.25: 22.9,-10.6 23,-10.6 23,-4.1 20.5,-4.1 20.5,-2.2 -21.9,-2.2 -21.9,2.9 -21.9,6.4 -19.6,6.4 -19.6,0.9 25.6,0.9

## Silkscreen, mask and mechanical layers (free items; w line width, h text height)
Top Overlay:
  region: 22.6,-8.725 22.6,-9.225 23.1,-8.975
  region: 22.6,9.25 22.6,8.75 23.1,9
  region: 24.25,4.3 23.75,4.3 24,3.8
  text "DENNIS / MICRO / COMPUTERS" at 7.9,2.721 h1
  text "DM-TINY" at 20.4,-3.249 h1 r90
  text "(C) 2024" at 22.3,-3.665 h1 r90
  text "LED" at -6.3,-7.166 h1 r90
Bottom Overlay:
  drawing of 9 lines, arcs and shapes, not listed
  text "EVB-A32M1-F REV 0.1" at 21.094,4.7 h1
  text "WWW.DENNISMICROS.COM" at 1.097,-7.4 h1
Mechanical 1:
  the board outline again, w0.1